# Altium PCB PCBLASTATEMP.PcbDoc
Units mm, origin at the board's own origin, x right, y up, seen from the top; angles counter-clockwise.
Board outline 17.78 x 43.18 mm, 2 copper layers (Top Layer, Bottom Layer); 23 components, 42 nets, 154 pads, 38 vias.
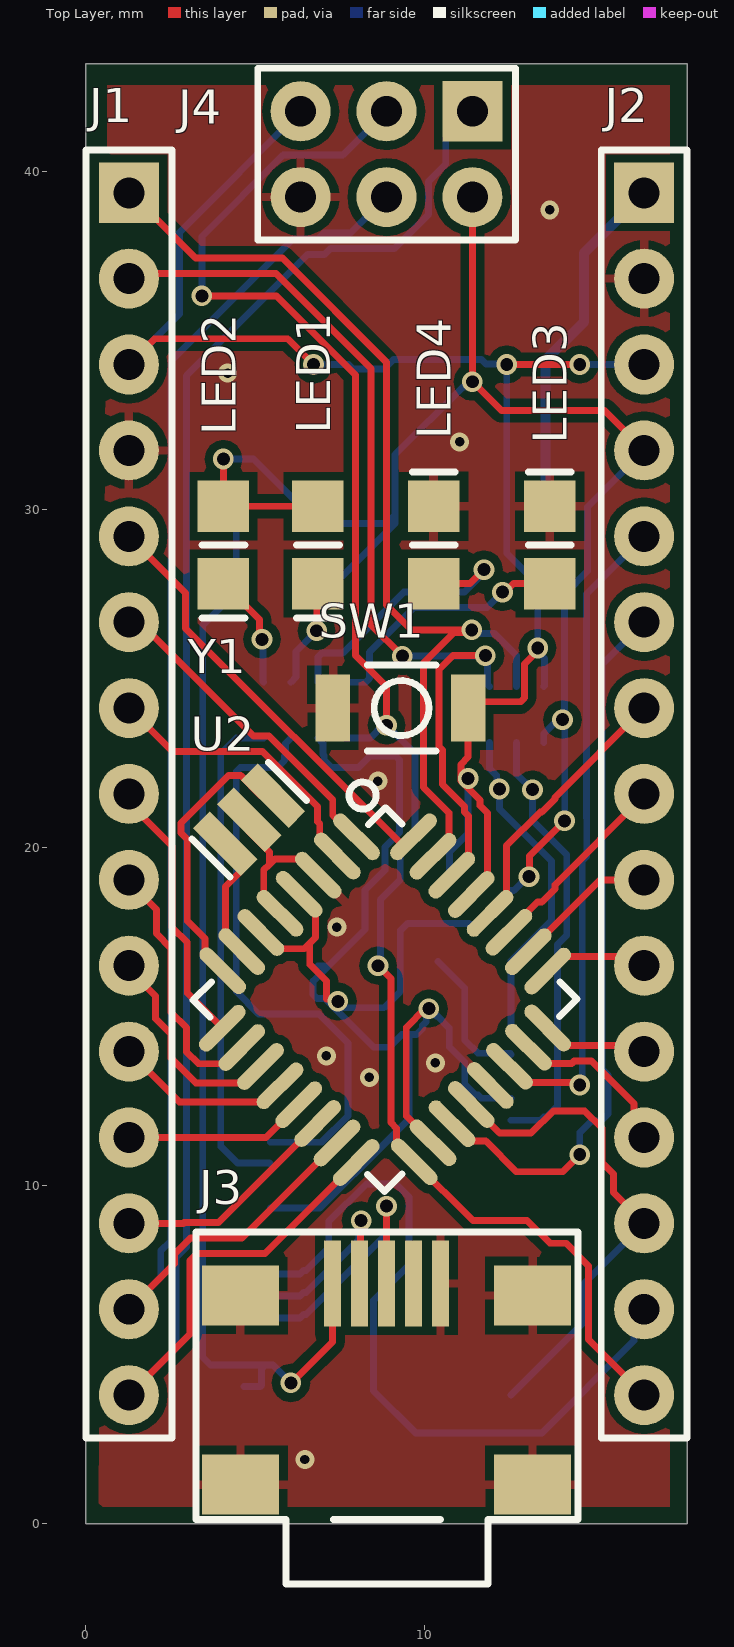
[diagram p0: Top Layer view]
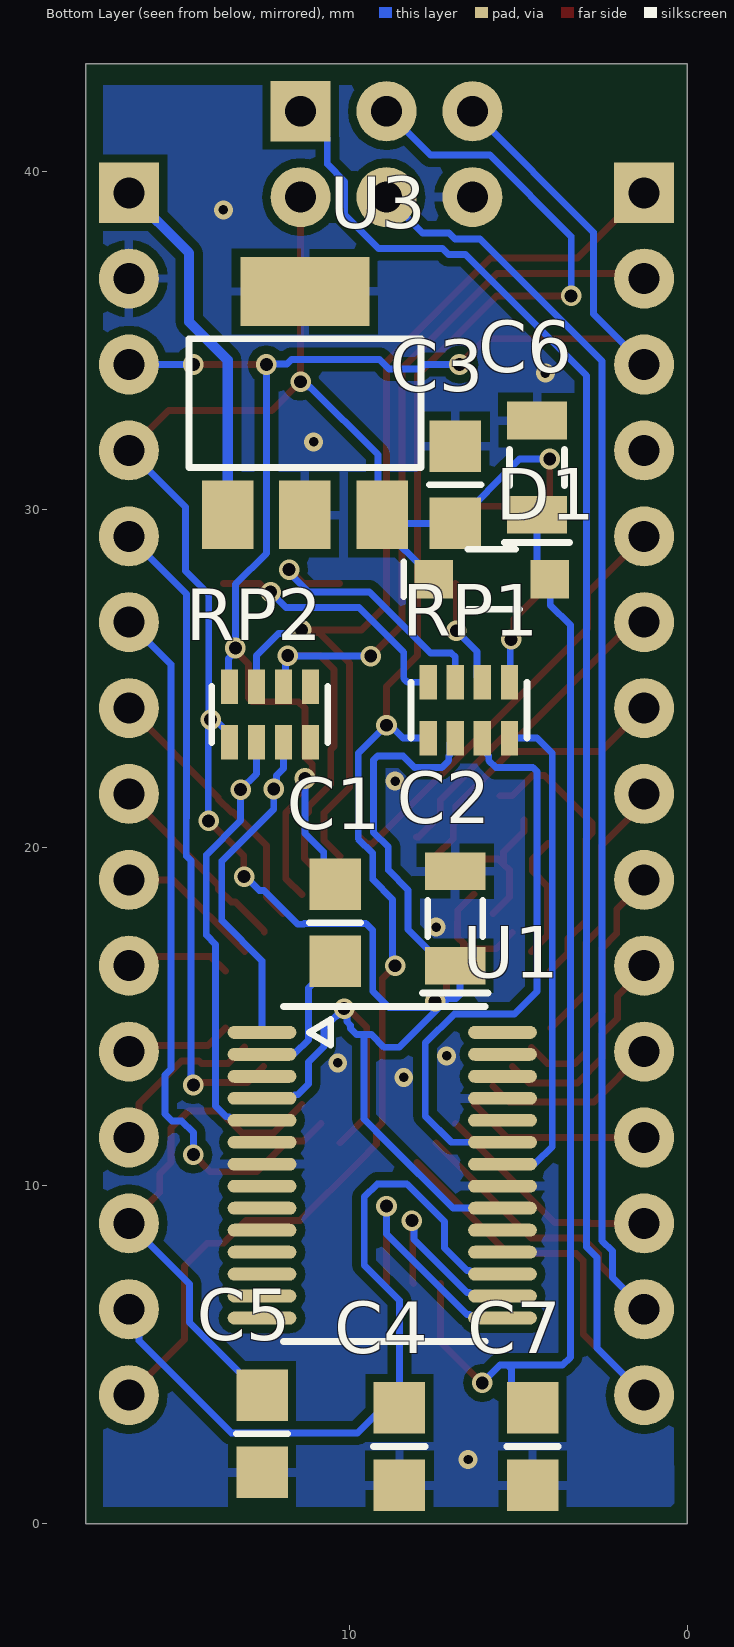
[diagram p1: Bottom Layer view, seen from below]

## Layer stack, top to bottom
Top Solder: solder mask 0.0102, Solder Resist, Dk 3.5
Top Layer: signal copper 0.0356
Dielectric 1: dielectric 0.32, FR-4, Dk 4.8
Bottom Layer: signal copper 0.0356
Bottom Solder: solder mask 0.0102, Solder Resist, Dk 3.5

## Board outline
0,0 0,43.18 17.78,43.18 17.78,0

## Design rules (kind name [scope] priority, off if disabled: settings)
Clearance [All] p1: gap=0.254 ignorepadtopadclearanceinfootprint=FALSE
PlaneConnect PlaneConnect_GND [All] p1: pad.planeconnectstyle=Direct pad.reliefexpansion=0.508 pad.reliefentries=4 pad.reliefconductorwidth=0.254 pad.reliefairgap=0.254 via.planeconnectstyle=Relief via.reliefexpansion=0.508 via.reliefentries=4 via.reliefconductorwidth=0.254 via.reliefairgap=0.254
PlaneConnect [All] p2: planeconnectstyle=Relief reliefexpansion=0.457 reliefentries=4 reliefconductorwidth=0.254 reliefairgap=0.203
PolygonConnect [All] p1: connectstyle=Relief reliefconductorwidth=0.254 reliefentries=4 polygonreliefangle="90 Angle" airgapwidth=0.254
RoutingVias [All] p1: holewidth=0.381 width=0.762 viastyle="Through Hole" minholewidth=0.305 minwidth=0.61 maxholewidth=0.457 maxwidth=0.66
SolderMaskExpansion [All] p1: expansion=0.102 istentingtop=FALSE
SupplyNets "Schematic Supply Nets_4" [InNet('+5')] p1: voltage=0.000
SupplyNets "Schematic Supply Nets_3" [InNet('GND')] p2: voltage=0.000
SupplyNets "Schematic Supply Nets_2" [InNet('+3.3')] p3: voltage=0.000
SupplyNets "Schematic Supply Nets_1" [InNet('VUSB')] p4: voltage=0.000
SupplyNets "Schematic Supply Nets" [InNet('VIN')] p5: voltage=0.000
Width Width_small [All] p1: maxlimit=1.27 minlimit=0.152 preferedwidth=0.203
Width Width_default [All] p2: maxlimit=1.27 minlimit=0.203 preferedwidth=0.254
29 further rules are at their usual default settings.

## Components (designator, comment, footprint, x,y, rotation, side; value= is the part's Value field where it differs from the comment)
C1 "0.1uF" CAP0805-NP 10.414,18.923 r270 bottom
C2 "4.7uF" TAN-A 6.858,16.51 r90 bottom
C3 "0.1uF" CAP0805-NP 6.858,29.591 r90 bottom
C4 "0.1uF" CAP0805-NP 8.509,3.429 r270 bottom
C5 "0.1uF" CAP0805-NP 12.573,3.81 r270 bottom
C6 "4.7uF" TAN-A 4.445,29.845 r90 bottom
C7 "0.1uF" CAP0805-NP 4.572,3.429 r270 bottom
D1 "MBR0520" SOD-123 7.493,27.94 r180 bottom
J1 "HEAD15-NOSS-1" HEAD15-NOSS-1 1.27,39.37 r270 top
J2 "HEAD15-NOSS-1" HEAD15-NOSS-1 16.51,39.37 r270 top
J3 "USB-MINI-B%C" USB-MINI-B_2 10.49,7.112 r180 top
J4 "HEAD3X2" HEAD3X2 11.43,41.783 r180 top
LED1 "RED_RX" LED0805 6.858,27.813 r90 top
LED2 "GREEN_TX" LED0805 4.064,27.813 r90 top
LED3 "L_AMBER" LED0805 13.716,30.099 r270 top
LED4 "BLUE" LED0805 10.287,30.099 r270 top
RP1 "330" RES4NT 7.658,23.241 r180 bottom
RP2 "1K" RES4NT 11.138,24.765 r0 bottom
SW1 "RESET" 157SW 7.302,24.13 r0 top
U1 "FT232RL" SSOP28 12.573,14.538 r270 bottom
U2 "ATMEGA328" QFP032 8.001,20.32 r225 top
U3 "UA78M05" SOT223 13.589,29.845 r180 bottom
Y1 "16MHz" RESONATOR 4.826,20.828 r45 top

## Footprints (in the part's own frame and the unit in brackets; to place one, negate y for a bottom-side part, rotate by r counter-clockwise, add the part's x,y. Pads: shape width x height; smd on the part's side, far side on the other; paste and mask are expansions set on the pad)
157SW [mil] "157SW"
  rect 40x78 smd: 1(0,0) 2(157.5,0)
  silkscreen extent 40,-50 120,50, body extent 0,-50 157,50, height 69
CAP0805-NP [mil] "CAP0805-NP"
  rect 60x60 smd: 1(0,0) 2(90,0)
  silkscreen extent 45,-30 45,30, body extent 5,-25 85,25, height 35
HEAD3X2 [mil] "HEAD3X2"
  rect 70x70 / inner round 0 / far side rect 70x70 hole 36: 1(0,0)
  round 70 / inner round 0 / far side round 70 hole 36: 2(0,100) 3(100,0) 4(100,100) 5(200,0) 6(200,100)
  silkscreen extent -50,-50 250,150, body extent -50,-50 250,150, height 445
HEAD15-NOSS-1 [mil] "HEAD15-NOSS-1"
  rect 70x70 / inner round 0 / far side rect 70x70 hole 36: 1(0,0)
  round 70 / inner round 0 / far side round 70 hole 36: 2(100,0) 3(200,0) 4(300,0) 5(400,0) 6(500,0) 7(600,0) 8(700,0) 9(800,0) 10(900,0) 11(1000,0) 12(1100,0) 13(1200,0) 14(1300,0) 15(1400,0)
  silkscreen extent -50,-50 1450,50, body extent -50,-50 1450,50, height 425
LED0805 [mil] "LED0805"
  rect 60x60 smd: 1(0,0) 2(90,0)
  silkscreen extent -40,-25 45,25, body extent 5,-25 85,25, height 31
QFP032 [mil] "QFP032"
  rrect100% 17x70 smd: 1(0,0) 2(31.48,0) 3(62.97,0) 4(94.45,0) 5(125.93,0) 6(157.42,0) 7(188.9,0) 8(220.38,0) 17(220,315) 18(188.9,314.83) 19(157.42,314.83) 20(125.93,314.83) 21(94.45,314.83) 22(62.97,314.83) 23(31.45,314.83) 24(0,314.83)
  rrect100% 70x17 smd: 9(268,47) 10(268,79) 11(268,110) 12(268,142) 13(268,173) 14(268,204) 15(268,236) 16(268.33,267.83) 25(-47,268) 26(-47,236) 27(-47,204) 28(-47,173) 29(-47,142) 30(-47,110) 31(-47,79) 32(-47,47)
  silkscreen extent -55,-45 269,315, body extent -48,0 269,315, height 47
RES4NT [mil] "RES4NT"
  rect 20x40 smd: 1(0,0) 2(31.5,0) 3(63,0) 4(94.5,0) 5(94.5,65) 6(63,65) 7(31.5,65) 8(0,65)
  silkscreen extent -20,0 115,65, body extent -20,0 115,65, height 24
RESONATOR [mm] "RESONATOR"
  rect 0.7x2 smd: 1(-1,0) 2(0,0) 3(1,0)
  silkscreen extent -1.6,-0.8 1.6,0.8, body extent -1.4,-0.8 1.4,0.8, height 1
SOD-123 [mil] "SOD-123"
  rect 45x45 smd: 1(0,0) 2(135,0)
  silkscreen extent -35,-35 100,35, body extent 10,-35 125,35, height 53
SOT223 [mil] "SOT223"
  rect 60x80 smd: 1(0,0) 2(90,0) 3(180,0)
  rect 150x80 smd: 4(90,260)
  silkscreen extent -45,55 225,205, body extent -45,55 225,205, height 67
SSOP28 [mil] "SSOP28"
  rrect100% 15x80 smd: 1(0,0) 2(25.6,0) 3(51.18,0) 4(76.77,0) 5(102.37,0) 6(127.95,0) 7(153.53,0) 8(179.13,0) 9(204.72,0) 10(230.32,0) 11(255.92,0) 12(281.5,0) 13(307.08,0) 14(332.68,0) 15(332.68,280) 16(307.08,280) 17(281.5,280) 18(255.92,280) 19(230.32,280) 20(204.72,280) 21(179.13,280) 22(153.53,280) 23(127.95,280) 24(102.37,280) 25(76.77,280) 26(51.18,280) 27(25.58,280) 28(0,280)
  silkscreen extent -30,25 360,260, body extent -30,25 360,260, height 79
TAN-A [mil] "TAN-A"
  rect 44x70 smd: 1(0,0) 2(110,0)
  silkscreen extent -32,-38 76,38, body extent -17,-32 127,32, height 63
USB-MINI-B_2 [mil] "USB-MINI-B_2"
  rect 20x100 smd: 1(0,0) 2(31.5,0) 3(62.99,0) 4(94.49,0) 5(125.98,0)
  rect 90x70 smd: 6(-106.99,234.17) 7(-106.99,14.17) 8(233.01,14.17) 9(233.01,234.17)
  silkscreen extent -160,-60 285,350, body extent -160,-60 285,350, height 156

## Part data
C1 C3 C4 C5 C7: library part CAP0805-NP, "Capacitor 0.1uF, 10%,50V", Manufacturer=KEMET, Part Number=C0805C104K5RACTU, DeviceSetName=CAP0805-NP, GateName_1=G$1, LibraryName=MySMD, SymbolName_1=CAP-NP
C2 C6: library part CAP-TANA-P, "Capacitor 4.7uF,10%,20V,TANT-A", Manufacturer=AVX, Part Number=TPSA475K020R1800, DeviceSetName=CAP-TANA-P, GateName_1=G$1, LibraryName=MySMD, SymbolName_1=CAP-P
D1: "MBR0520 SOD-123", Manufacturer="ON Semiconductor", Part Number=MBR0520LT1G, DeviceSetName=MBR0520, GateName_1=G$1, LibraryName=MySMD, SymbolName_1=SCHOTTKY
J1 J2: "HEAD15-NOSS 2.54mm", Manufacturer=MOLEX, Part Number=22-03-2151, DeviceSetName=HEAD15-NOSS-1, GateName_1=G$1, LibraryName=MyCON2, SymbolName_1=HEAD15-NOSS
J3: library part USB-MINI-B, "USB-MINI-B", Manufacturer=TE, Part Number=1734035-2, DeviceName=%C, DeviceSetName=USB-MINI-B, GateName_1=G$1, LibraryName=MyCON2, SymbolName_1=USB
J4: "HEAD3X2 2.54mm", Manufacturer=3M, Part Number=961206-6404-AR, DeviceSetName=HEAD3X2, GateName_1=G$1, LibraryName=MyCON2, SymbolName_1=HEAD3X2
LED1: library part LED0805_RED_LH-R974_OSRAM, "RED_RX LED0805", Manufacturer="OS RAM", Part Number="LH R974", DeviceSetName=LED0805, GateName_1=G$1, LibraryName=MySMD, SymbolName_1=LED
LED2: library part LED0805_LTST-C171GKT_LITE-ON, "GREEN_TX LED0805", Manufacturer=LITE-ON, Part Number=LTST-C171GKT, DeviceSetName=LED0805, GateName_1=G$1, LibraryName=MySMD, SymbolName_1=LED
LED3: library part LED0805_LTST-C171AKT_LITE-ON, "L_AMBER LED0805", Manufacturer=LITE-ON, Part Number=LTST-C171AKT, DeviceSetName=LED0805, GateName_1=G$1, LibraryName=MySMD, SymbolName_1=LED
LED4: library part LED0805_LTST-C170TBKT_LITE-ON, "BLUE LED0805", Manufacturer=LITE-ON, Part Number=LTST-C170TBKT, DeviceSetName=LED0805, GateName_1=G$1, LibraryName=MySMD, SymbolName_1=LED
RP1: library part RES4NT_1, "330 RES4NT", Manufacturer=Panasonic, Part Number=EXB38V331JV, DeviceSetName=RES4NT, GateName_1=A, GateName_2=B, GateName_3=C, GateName_4=D, LibraryName=MySMD, SymbolName_1=RES4NT, SymbolName_2=RES4NT, SymbolName_3=RES4NT, SymbolName_4=RES4NT
RP2: library part RES4NT, "1K RES4NT", Manufacturer=Panasonic, Part Number=EXB38V102JV, DeviceSetName=RES4NT, GateName_1=A, GateName_2=B, GateName_3=C, GateName_4=D, LibraryName=MySMD, SymbolName_1=RES4NT, SymbolName_2=RES4NT, SymbolName_3=RES4NT, SymbolName_4=RES4NT
SW1: library part PB157, "RESET PB157 157SW", Manufacturer=OMRON, Part Number=B3U-1000P, DeviceSetName=PB157, GateName_1=G$1, LibraryName=MySMD, SymbolName_1=PBSWITCH
U1: "FT232RL FT232RL SSOP28", Manufacturer=FTDI, DeviceSetName=FT232RL, GateName_1=G$1, LibraryName=MySMD2, Part Number=FT232RL, SymbolName_1=FL232RL
U2: library part ATMEGA168-20AU, "ATMEGA328P-AU ATMEGA168-20AU QFP032", Manufacturer=Microchip, Part Number=ATMEGA328P-AU, DeviceSetName=ATMEGA168-20AU, GateName_1=G$1, LibraryName=MySMD, SymbolName_1=ATMEGA168-20AU
U3: "UA78M05 SOT223", Manufacturer=TI, Part Number=UA78M05CDCY, DeviceSetName=UA78M05, GateName_1=G$1, LibraryName=MySMD, SymbolName_1=UA78M05
Y1: library part RESONATORMU, "16MHz RESONATOR", Manufacturer=Murata, Part Number=CSTCE16M0V53A-R0, DeviceName=MU, DeviceSetName=RESONATOR, GateName_1=G$1, LibraryName=MySMD2, SymbolName_1=RESONATOR

## Via types
v1: diameter 0.61, hole 0.381, Top Layer to Bottom Layer, 29 vias
v2: diameter 0.559, hole 0.279, Top Layer to Bottom Layer, 9 vias

## Nets (pads, with @x,y where several pads share a name; then routed paths per layer and width w, separated by ;. In a path a pad name is that pad's centre, name@x,y a point inside that pad or via, vN(x,y) a via of type N, cw(c..) or ccw(c..) an arc to the next point about the centre after c; other vN are vias at no path point)
+3.3: C4.1 J2.14 U1.17 | length 22.4
  Bottom Layer w0.203: U1.17 6.335,7.388 6.438,7.492 6.513,7.492 7.179,8.158 7.179,8.946 8.292,10.058 9.164,10.058 9.55,9.672 9.55,7.655 8.509,6.614 8.509,3.937 9.754,2.692 13.482,2.692 16.209,5.419 16.209,6.049 J2.14
+5: C2.1 C3.1 D1.1 J2.4 J4.2 LED1.2 LED2.2 RP1.2 RP2.5 U1.4 U1.20 U2.4 U2.6 U2.18 U3.3 | length 91.2
  Top Layer w0.203: v1(4.064,31.496) LED2.2 LED1.2 ; U2.6 5.656,17.011 6.452,17.011 6.619,17.178 ; U2.4 6.784,18.144 6.784,17.821 6.787,17.819 6.787,17.346 6.619,17.178 ; v1(7.452,15.453) 7.376,15.529 7.112,15.529 7.112,16.056 6.619,16.549 6.619,17.178 ; v1(10.143,15.24) 10.033,15.24 9.474,14.681 9.474,12.061 U2.18 ; J4.2 v1(11.43,33.782) 12.285,32.927 15.333,32.927 J2.4 ; v1(13.103,19.145) 13.113,19.155 13.113,19.755 v1(14.153,20.794)
  Bottom Layer w0.203: v1(4.064,31.496) 4.953,31.496 C3.1 8.89,29.591 U3.3@9.144,29.845 ; U1.20 6.925,9.338 8.89,11.303 9.56,11.973 9.56,14.478 ; C2.1 C2.1@7.188,16.51 ; RP1.2 7.01,23.089 7.01,22.754 7.048,22.716 7.048,22.586 7.257,22.377 8.059,22.377 8.398,22.716 9.152,22.716 9.271,22.597 9.271,20.453 8.839,20.022 8.839,19.335 8.255,18.75 8.255,17.577 C2.1@7.188,16.51 ; v1(7.452,15.453) 7.452,15.3 7.418,15.266 8.808,15.266 9.296,15.754 9.296,17.546 9.505,17.755 11.323,17.755 11.343,17.735 11.512,17.735 12.51,18.733 12.653,18.733 13.066,19.145 v1(13.103,19.145) ; D1.1 9.144,29.591 U3.3@9.144,29.845 ; v1(11.43,33.782) 11.348,33.782 11.195,33.63 11.151,33.63 9.144,31.623 U3.3@9.144,29.845 ; U1.4 11.699,12.588 11.596,12.692 11.54,12.692 11.521,12.692 11.201,13.012 11.201,13.665 10.744,14.123 10.744,14.673 10.392,15.025 10.358,15.025 v1(10.143,15.24) 10.065,15.162 10.065,14.858 9.955,14.748 9.955,14.654 9.779,14.478 9.56,14.478 ; RP2.5 13.538,23.368 13.879,23.709 13.906,23.709 13.984,23.786 v1(14.094,23.786) ; v1(14.153,20.794) 14.162,20.803 14.162,23.748 14.162,23.812 14.148,23.826 14.148,27.494 14.834,28.18 14.834,30.074 J2.4 ; C2.1@7.188,16.51 6.731,16.053 6.716,16.053 6.716,15.661 6.835,15.541 7.076,15.541 7.385,15.233 8.521,14.097 8.959,14.097 9.34,14.478 9.56,14.478
A0: J2.12 U2.23 | length 5
  Top Layer w0.203: U2.23 13.573,13.618 14.368,13.618 14.439,13.689 14.953,13.689 16.209,12.433 16.209,11.731 J2.12
A1: J2.11 U2.24 | length 3.1
  Top Layer w0.203: U2.24 14.175,14.146 16.334,14.146 J2.11
A2: J2.10 U2.25 | length 3.1
  Top Layer w0.203: U2.25 14.091,16.783 16.237,16.783 J2.10
A3: J2.9 U2.26 | length 4.3
  Top Layer w0.203: U2.26 15.208,19.05 J2.9
A4: J2.8 U2.27 | length 5.8
  Top Layer w0.203: U2.27 12.509,17.545 13.354,18.39 13.482,18.39 13.868,18.776 13.868,18.904 16.51,21.546 J2.8
A5: J2.7 U2.28 | length 8
  Top Layer w0.203: U2.28 12.443,18.548 12.443,20.063 13.437,21.057 13.482,21.057 13.868,21.443 13.868,21.488 J2.7
A6: J2.6 U2.19 | length 21.4
  Top Layer w0.203: U2.19 11.34,11.326 11.825,11.326 12.737,10.414 14.097,10.414 v1(14.605,10.922)
  Bottom Layer w0.203: v1(14.605,10.922) 14.605,11.574 14.949,11.918 15.237,11.918 15.443,12.123 15.443,13.277 15.265,13.454 15.265,19.566 15.27,19.57 15.27,21.07 15.265,21.074 15.265,25.425 J2.6
A7: J2.5 U2.22 | length 19.3
  Top Layer w0.203: U2.22 13.006,13.053 14.532,13.053 v1(14.605,12.98)
  Bottom Layer w0.203: v1(14.605,12.98) 14.678,13.053 14.678,19.625 14.813,19.76 14.813,20.88 14.808,20.885 14.808,27.508 J2.5
AREF: C5.1 J2.13 U2.20 | length 14.7
  Top Layer w0.203: U2.20 12.238,11.56 13.166,11.56 13.824,12.217 14.752,12.217 15.265,11.704 15.265,10.688 15.599,10.354 15.599,9.801 J2.13
  Bottom Layer w0.203: C5.1 14.721,5.958 14.721,7.101 J2.13
D0/RX: J1.2 RP2.2 U2.30 | length 28.9
  Top Layer w0.203: J1.2 1.422,36.982 5.619,36.982 8.433,34.169 8.433,26.592 v1(9.356,25.668) ; U2.30 11.311,19.679 11.311,20.935 11.194,21.052 11.194,21.222 10.541,21.875 10.541,22.891 10.439,22.992 10.439,25.268 10.851,25.679 v1(11.811,25.679)
  Bottom Layer w0.203: v1(9.356,25.668) 9.362,25.674 11.805,25.674 v1(11.811,25.679) 11.874,25.616 11.874,24.828 RP2.2
D1/TX: J1.1 RP2.3 U2.31 | length 30.3
  Top Layer w0.203: J1.1 2.057,38.583 2.102,38.583 3.245,37.44 5.808,37.44 8.89,34.358 8.89,27.183 9.629,26.444 10.891,26.444 11.331,26.444 v1(11.409,26.444) 11.331,26.366 10.891,26.366 9.982,25.457 9.982,21.787 10.737,21.033 10.737,20.218 U2.31
  Bottom Layer w0.203: v1(11.409,26.444) 11.519,26.444 11.623,26.34 12.085,26.34 12.738,25.686 RP2.3
D2: J1.5 U2.32 | length 12.9
  Top Layer w0.203: J1.5 2.946,27.534 2.946,26.485 9.325,20.106 9.475,20.106 U2.32
D3: J1.6 U2.1 | length 9.6
  Top Layer w0.203: J1.6 1.589,26.67 4.957,23.303 5.41,23.303 7.301,21.412 7.301,20.959 7.939,20.32 U2.1
D4: J1.7 U2.2 | length 8.5
  Top Layer w0.203: J1.7 2.555,22.845 5.221,22.845 6.843,21.223 6.843,20.769 6.916,20.697 6.916,20.274 U2.2
D5: J1.8 U2.9 | length 8.1
  Top Layer w0.203: J1.8 1.27,21.325 2.54,20.055 2.54,17.647 2.995,17.191 2.995,15.699 U2.9
D6: J1.9 U2.10 | length 7.8
  Top Layer w0.203: J1.9 1.27,18.987 2.083,18.175 2.083,17.457 2.515,17.026 2.515,15.132 2.972,14.675 2.972,13.962 3.322,13.612 4.131,13.612 U2.10
D7: J1.10 U2.11 | length 6.4
  Top Layer w0.203: J1.10 1.27,16.397 2.057,15.609 2.057,14.943 2.515,14.486 2.515,13.773 3.247,13.04 4.673,13.04 U2.11
D8: J1.11 U2.12 | length 5.3
  Top Layer w0.203: J1.11 2.76,12.48 5.262,12.48 U2.12
D9: J1.12 U2.13 | length 5.4
  Top Layer w0.203: J1.12 5.325,11.43 U2.13
D10: J1.13 U2.14 | length 6.8
  Top Layer w0.203: J1.13 2.881,8.89 2.902,8.911 3.92,8.911 U2.14
D11/MOSI: J1.14 J4.4 U2.15 | length 45.3
  Top Layer w0.203: J1.14 2.616,7.696 2.616,7.978 3.092,8.454 4.612,8.454 U2.15
  Bottom Layer w0.203: J1.14 2.21,7.29 2.21,8.07 2.515,8.374 2.515,34.392 4.348,36.225 6.121,37.998 6.866,37.998 7.043,38.176 7.823,38.176 J4.4
D12/MISO: J1.15 J4.1 U2.16 | length 54.4
  Top Layer w0.203: J1.15 3.073,5.613 3.073,7.788 3.281,7.997 5.298,7.997 U2.16
  Bottom Layer w0.203: J1.15 2.667,5.207 2.667,7.88 2.972,8.185 2.972,33.96 6.553,37.541 7.055,37.541 7.233,37.719 9.126,37.719 10.135,38.727 10.135,39.708 10.643,40.216 10.643,40.996 J4.1
D13/SCK: J2.15 J4.3 RP1.1 U2.17 | length 51.5
  Top Layer w0.203: v1(3.429,36.322) 5.633,36.322 7.976,33.979 7.976,25.679 8.89,24.765 v1(8.89,23.622) ; v1(8.636,16.51) 9.017,16.129 9.017,11.872 9.188,11.701 9.188,11.231 U2.17 11.444,8.974 13.045,8.974 13.717,8.302 14.192,8.302 14.864,7.63 14.864,5.456 J2.15
  Bottom Layer w0.203: v1(3.429,36.322) 3.429,38.082 5.834,40.488 7.595,40.488 J4.3 ; RP1.1 8.409,23.241 8.79,23.622 8.892,23.622 9.728,22.786 9.728,20.264 9.296,19.832 9.296,19.057 8.712,18.473 8.712,16.586 v1(8.636,16.51)
GND: C2.2 C3.2 C4.2 C5.2 C6.2 C7.2 J1.4 J2.2 J3.1 J3.6 J3.7 J3.8 J3.9 J4.6 LED3.1 LED4.1 SW1.1 U1.7 U1.18 U1.21 U1.25 U2.3 U2.5 U2.21 U3.2 U3.4 Y1.2 | length 5
  Top Layer w0.203: Y1.2 4.826,20.477 5.429,19.874 5.429,19.508 ; U2.5 5.257,18.54 5.257,19.336 5.429,19.508 ; U2.3 6.388,19.671 5.592,19.671 5.429,19.508
  other v2: 6.477,1.905 8.382,13.208 10.333,13.635 7.112,13.843 7.422,17.653 8.636,21.971 11.049,32.004 4.191,34.036 13.716,38.862
NetC1_2: C1.2 U1.2 | length 4.2
  Bottom Layer w0.203: C1.2 11.201,15.85 11.201,14.312 11.591,13.922 12.539,13.922 U1.2
NetJ3_3: J3.3 U1.15 | length 7.6
  Top Layer w0.203: J3.3 v1(8.89,9.398)
  Bottom Layer w0.203: U1.15 6.335,6.088 6.439,6.192 6.513,6.192 8.89,8.57 v1(8.89,9.398)
NetJ3_4: J3.4 U1.16 | length 5.8
  Top Layer w0.203: J3.4 8.114,7.137 8.114,8.947 v1(8.139,8.972)
  Bottom Layer w0.203: U1.16 6.335,6.738 6.438,6.842 6.513,6.842 8.078,8.407 8.078,8.911 v1(8.139,8.972)
NetLED1_1: LED1.1 RP1.6 | length 3.3
  Top Layer w0.203: v1(6.824,26.415) 6.824,27.779 LED1.1
  Bottom Layer w0.203: RP1.6 6.21,25.044 6.21,25.802 v1(6.824,26.415)
NetLED2_1: LED2.1 RP1.5 | length 3.4
  Top Layer w0.203: LED2.1 5.129,26.748 5.129,26.24 v1(5.207,26.162)
  Bottom Layer w0.203: v1(5.207,26.162) 5.232,26.137 5.232,24.917 RP1.5
NetLED3_2: LED3.2 RP1.8 | length 7.7
  Top Layer w0.203: v1(12.319,27.559) 12.395,27.559 12.649,27.813 LED3.2
  Bottom Layer w0.203: RP1.8 8.263,24.892 8.382,25.011 8.382,25.781 9.705,27.104 11.864,27.104 v1(12.319,27.559)
NetLED4_2: LED4.2 RP1.7 | length 8.4
  Top Layer w0.203: LED4.2 11.354,27.813 11.767,28.226 v1(11.771,28.226)
  Bottom Layer w0.203: RP1.7 6.858,25.637 6.977,25.756 7.595,25.756 9.4,27.561 11.199,27.561 11.771,28.133 v1(11.771,28.226)
NetRP1_5: RP1.4 U1.22 | length 14.8
  Bottom Layer w0.203: RP1.4 4.445,23.241 3.988,22.784 3.988,11.164 4.479,10.673 5.427,10.673 U1.22
NetRP1_6: RP1.3 U1.23 | length 17.5
  Bottom Layer w0.203: U1.23 6.97,11.288 7.747,12.065 7.747,14.224 6.887,15.084 6.258,15.084 5.109,15.084 4.445,15.748 4.445,22.258 4.564,22.377 5.659,22.377 5.867,22.586 5.867,22.716 5.905,22.754 5.905,23.089 RP1.3
NetU2_7: U2.7 Y1.1 | length 3.8
  Top Layer w0.203: Y1.1 4.579,19.661 4.579,19.31 4.126,18.858 4.126,17.409 U2.7
NetU2_8: U2.8 Y1.3 | length 8.4
  Top Layer w0.203: U2.8 3.523,16.882 3.523,17.31 2.997,17.836 2.997,20.245 2.809,20.433 2.809,20.728 4.219,22.138 4.579,22.138 5.182,21.535 Y1.3
RESET: C1.1 J1.3 J2.3 J4.5 RP2.4 SW1.2 U2.29 | length 49.1
  Top Layer w0.203: J1.3 2.032,35.052 5.969,35.052 v1(6.731,34.29) ; v1(11.303,22.047) 11.087,22.263 ; U2.29 11.871,19.09 11.871,21.022 11.651,21.242 11.651,21.411 11.087,21.976 11.087,22.263 ; v1(12.446,34.29) v1(14.605,34.29) ; v1(13.36,25.908) 13.36,25.823 12.97,25.433 12.97,24.435 12.851,24.316 11.489,24.316 SW1.2 11.303,22.68 11.087,22.463 11.087,22.263
  Bottom Layer w0.203: J1.3 2.769,35.789 2.769,38.202 J4.5 ; v1(6.731,34.29) 7.765,34.29 7.892,34.163 8.815,34.163 9.094,34.442 11.704,34.442 11.836,34.31 12.426,34.31 v1(12.446,34.29) 12.446,28.707 13.36,27.793 v1(13.36,25.908) 13.36,25.798 13.564,25.595 13.564,24.79 RP2.4 ; C1.1 10.748,19.257 10.748,19.871 11.303,20.425 v1(11.303,22.047) ; v1(14.605,34.29) J2.3
RX: RP2.7 U1.1 | length 9.8
  Bottom Layer w0.203: RP2.7 11.938,22.346 12.148,22.136 12.148,21.814 v1(12.226,21.736) 12.226,21.17 12.226,21.14 13.764,19.602 13.764,17.845 12.573,16.654 U1.1
TX: RP2.6 U1.5 | length 13
  Bottom Layer w0.203: U1.5 13.447,11.938 13.551,12.042 13.625,12.042 13.945,12.362 13.945,17.14 14.221,17.416 14.221,19.791 13.208,20.804 v1(13.208,21.717) 12.738,22.187 RP2.6
VIN: J2.1 U3.1 | length 10.7
  Bottom Layer w0.305: U3.1 13.589,34.417 14.732,35.56 14.732,37.592 J2.1
VUSB: C6.1 C7.1 D1.2 J3.5 | length 32.9
  Top Layer w0.203: v1(6.06,4.173) 6.078,4.173 7.29,5.385 J3.5
  Bottom Layer w0.203: C6.1 4.445,28.321 D1.2 4.049,27.925 4.049,27.183 3.454,26.588 3.454,4.928 3.683,4.699 5.309,4.699 ; C7.1@4.674,4.064 5.164,4.064 5.19,4.089 5.19,4.58 5.309,4.699 ; v1(6.06,4.173) 5.534,4.699 5.309,4.699
pads on no net: J3.2 RP2.1 RP2.8 U1.3 U1.6 U1.8 U1.9 U1.10 U1.11 U1.12 U1.13 U1.14 U1.19 U1.24 U1.26 U1.27 U1.28

## Polygon pours and split planes (outlines as drawn)
GND on Top Layer "GND_L01_P000" (solid, remove dead copper, pour order 0): 0.635,42.545 17.272,42.545 17.272,0.508 0.381,0.508
GND on Bottom Layer "GND_L02_P001" (solid, remove dead copper, pour order 1): 0.635,42.545 17.272,42.545 17.272,0.508 0.381,0.508

## Silkscreen, mask and mechanical layers (free items; w line width, h text height)
DXF:
  drawing of 399 lines, arcs and shapes, not listed
  text ".700" at 7.035,44.793 h0.79
  text "J1" at 0.864,41.046 h0.51
  text "J2" at 15.9,41.046 h0.51
  text "J4" at 8.306,36.855 h0.51
  text "LED3" at 13.792,31.471 h0.51 r90
  text "LED4" at 10.389,31.42 h0.51 r90
  text "LED1" at 6.553,31.344 h0.51 r270
  text "LED2" at 3.835,31.318 h0.51 r270
  text "SW1" at 8.636,25.781 h0.51
  text "Y1" at 3.2,22.098 h0.51
  text "1.700" at -5.789,21.298 h0.79
  text "1" at 3.327,19.304 h0.51
  text "U1" at 8.509,15.291 h0.51
  text "J3" at 8.306,4.216 h0.51
FAB_NOTES:
  drawing of 237 lines, arcs and shapes, not listed
  text "REVISIONS" at 273.183,227.463 h2.54
  text "REV" at 202.063,219.843 h2.54
  text "DESCRIPTION" at 250.323,219.843 h2.54
  text "DATE" at 323.983,219.843 h2.54
  text "APPROVED" at 341.763,219.843 h2.54
  text "Layer" at 14.034,203.644 h1.52
  text "Name" at 24.445,203.644 h1.52
  text "Material" at 48.061,203.644 h1.52
  text "Thickness" at 69.899,203.644 h1.52
  text "Constant" at 86.405,203.644 h1.52
  text "Board Layer Stack" at 100.879,203.644 h1.52
  text "Top Overlay" at 24.445,200.596 h1.52
  text "Top Solder" at 24.445,197.548 h1.52
  text "Solder Resist" at 48.061,197.548 h1.52
  text "0.40mil" at 69.899,197.548 h1.52
  text "3.5" at 86.405,197.548 h1.52
  text "1" at 14.034,194.5 h1.52
  text "Top Layer" at 24.445,194.5 h1.52
  text "1.40mil" at 69.899,194.5 h1.52
  text "Dielectric 1" at 24.445,191.452 h1.52
  text "FR-4" at 48.061,191.452 h1.52
  text "12.60mil" at 69.899,191.452 h1.52
  text "4.8" at 86.405,191.452 h1.52
  text "2" at 14.034,188.404 h1.52
  text "Bottom Layer" at 24.445,188.404 h1.52
  text "1.40mil" at 69.899,188.404 h1.52
  text "Bottom Solder" at 24.445,185.356 h1.52
  text "Solder Resist" at 48.061,185.356 h1.52
  text "0.40mil" at 69.899,185.356 h1.52
  text "3.5" at 86.405,185.356 h1.52
  text "Bottom Overlay" at 24.445,182.308 h1.52
  text "FAB NOTES:UNLESS OTHERWISE SPECIFIED. /    1.  THE FINISHED PRINTED CIRCUIT BOARD SHALL MEET THE REQUIREMENTS OF /        IPC-A-600, CLASS 2, AND ROHS COMPLIANCE. /  /    2.  CONFIGURATION OF THE PRINTED CIRCUIT BOARD NOT SPECIFICALLY /        DIMENSIONED ON THE DRAWING SHALL BE CONTROLLED BY THE GERBER DATA. /  /    3.  MATERIAL:  /        A. NEMA GRADE, GLASS EPOXY, NATURAL COLOR /        B. FR406 OR EQUIVALENT LAMINATED HIGH TEMP FR-4 WITH A MINIMUM TG: 170C /        C. THIS PRINTED CIRCUIT BOARD WILL BE 02 LAYERS. /         /    4.  FINISH:  /        A. ALL HOLES AND CONDUCTIVE SURFACES SHALL BE PLATED WITH .001\" /           COPPER MINIMUM, .003\" MAXIMUM,  /           COPPER TO BE MEASURED AT THE CENTER OF VIA HOLE. /        B. ALL COPPER AREAS SHALL BE FINISHED WITH IMMERSION GOLD 2u\" (2 MICROINCHES) /           MINIMUM TO 3u\" MAXIMUM. /        C. VIA IN PAD TECHNOLOGY, THE VIA HOLES (SIZE = .004\";.010\";.012\") SHALL BE FILLED  /           WITH CONDUCTIVE EPOXY THEN PLANALIZED AND PLATED OVER (IF APPLICABLE). /            /    5.  DRILLING: /        A. ALL HOLE'S DIMENSIONS ARE STATED AS FINISHED HOLE SIZES. /        B. LASER DRILLED BLIND MICROVIA-IN-PAD SHALL BE FILLED TO PREVENT VIA  /           OUT-GASSING IN LASER DEFINED HOLES .004\" OR GREATER (IF APPLICABLE). /        B. AN NC DRILL FILE HAS BEEN SUPPLIED - SEE DRILL TABLE. /     /    6.  SOLDER MASK:  /        A. PHOTO-IMAGED LIQUID POLYMER ON BOTH SIDES OF BOARD IN /           ACCORDANCE WITH IPC-SM-840. TYPE B, CLASS 2, OVER BARE COPPER. /        B. SOLDER MASK COLOR TO BE GREEN. /        C. MASK THICKNESS: .0004\" MINIMUM, .0013\" MAXIMUM. /        D. DO NOT BLOCK MASK FINE PITCH SMD PADS. /  /    7.  SILKSCREEN: (IF APPLICABLE) /        A. SILKSCREEN BOTH SIDES WITH WHITE, NON-CONDUCTIVE EPOXY INK.  /        B. LANDS AND EXPOSED PLATED AREAS TO BE FREE OF INK. /  /    8.  BOW AND TWIST: SHALL NOT EXCEED .007\" PER INCH. /  /    9.  ELECTRICAL TEST:  /        A. THE PRINTED WIRING BOARD SHALL BE 100% ELECTRICALLY TESTED  /           FOR OPENS AND SHORTS. THE RESULTS OF THE ELECTRICAL TEST  /           SHALL BE DOCUMENTED AND DELIVERED ALONG WITH EACH LOT. /        B. APPLY TEST STAMP IN NON-LEGEND AREA ON SOLDER SIDE OF PCB. /        C. TEST IS REQUIRED ON BOTH SIDES OF THE BOARD. /  /    10. FABRICATION TOLERANCES:  /        A. END PRODUCT TRACE WIDTHS AND LANDS SHALL NOT VARY MORE THAN  /           THE SMALLER OF .002\" OR 20% OF THE TRACE WIDTH FROM /           THE GERBER DATA /  /    11. INSPECTION: /        A. AUTOMATIC OPTICAL INSPECTION OF ALL LAYERS REQUIRED. /        B. THE IMPEDANCE SHOULD BE CONTROLLED BY STACKUP LAYER. /     /    12. CLEANLINESS: /        A. BOARDS SHALL BE FREE OF FIBER GLASS DUST OR ANY OTHER FOREIGN MATERIAL. /        B. FINISHED BOARDS MUST CONFORM TO 0.01 mg/IN MAXIMUM NACL IONIC  /           CONTAMINATION AS MEAXURED BY THE OMEGA METER 600SMD. /  /    13. NO GERBER MODIFICATIONS ALLOWED WITHOUT PRIOR WRITTEN APPROVAL FROM VIETTEL  /        EXCEPT FOR IMPEDANCE TRACE WIDTHS MODIFICATION TO MEET REQUIREMENTS,  /        AND THE ADDITION OF TEAR DROPS WHERE REQUIRED.  /         /    14. SUPPRESS UNCONNECTED PADS FOR ALL INNER  LAYERS. /     /    15. INSIDE CORNNER SHOULD BE ROUNDED-OFF." at 246.126,49.276 h0.8
  text "COMPANY NAME:" at 294.773,-14.472 h1.52
  text "UNLESS OTHERWISE" at 344.854,-15.361 h1.02
  text "SPECIFIED DIMENSIONS" at 344.854,-17.266 h1.02
  text "FAB DRAWING" at 278.602,-17.596 h2.03
  text "COMPANY NAME" at 318.861,-18.917 h2.03
  text "ARE IN INCHES" at 344.854,-19.171 h1.02
  text "COMPANY LOGO" at 239.154,-21.069 h1.78
  text "PROJECT NAME:" at 294.773,-22.092 h1.52
  text "DESIGNER:" at 265.563,-22.473 h1.27
  text "INITIAL" at 275.723,-22.473 h1.27
  text "TOLERANCES" at 344.854,-22.981 h1.02
  text "CHECKER:" at 265.563,-25.267 h1.27
  text "INITIAL" at 275.723,-25.267 h1.27
  text "BOARD NAME" at 318.861,-25.267 h2.03
  text "DECIMAL" at 345.87,-25.267 h1.02
  text "ANGLE" at 357.391,-25.26 h1.02
  text "COMPANY NAME AND ADDRESS" at 237.757,-25.641 h1.02
  text "X" at 347.612,-26.911 h1.02
  text ".1" at 349.637,-26.918 h1.02
  text "30" at 359.586,-27.045 h1.02
  text "SHEET:" at 332.873,-27.807 h1.52
  text "FAB NUMBER:" at 294.875,-27.832 h1.52
  text "REV." at 325.26,-27.927 h1.52
  text "DATE:" at 265.817,-28.061 h1.27
  text "DDMMMYY" at 272.421,-28.061 h1.27
  text "XX" at 346.596,-28.435 h1.02
  text "MACH FINISH" at 353.708,-28.435 h1.02
  text ".03" at 349.637,-28.442 h1.02
  text "XXX" at 345.58,-29.959 h1.02
  text ".010" at 349.637,-29.966 h1.02
  text "JOB#:" at 265.563,-30.855 h1.27
  text "RD-DDMMYYYY-01" at 271.913,-30.855 h1.27
  text "1 OF 1" at 330.34,-30.975 h2.03
  text "NUMBER" at 296.501,-30.982 h2.03
  text "-" at 326.481,-30.982 h2.03
Drill Drawing:
  circle w0.254: c14.24,156.993 r0.847
  lines w0.254: 13.393,152.337 15.087,152.337 15.087,154.03 13.393,154.03 13.393,152.337 ; 13.393,160.38 13.817,160.38 14.24,159.957 14.663,160.38 15.087,160.38 14.663,160.803 15.087,161.226 14.663,161.226 14.24,161.65 13.817,161.226 13.393,161.226 13.817,160.803 13.393,160.38
  lines w0.381: 11.874,151.194 137.977,151.194 ; 11.874,162.624 137.977,162.624 ; 25.867,147.383 25.867,166.433 ; 39.579,147.383 39.579,166.433 ; 67.257,147.383 67.257,166.433 ; 80.106,147.383 80.106,166.433 ; 98.745,147.383 98.745,166.433 ; 11.874,147.383 137.977,147.383 137.977,166.433 11.874,166.433 11.874,147.383
  text "Symbol" at 14.16,163.766 h1.83
  text "Count" at 27.01,163.766 h1.83
  text "Hole Size" at 40.722,163.766 h1.83
  text "Plated" at 68.4,163.766 h1.83
  text "Hole Type" at 81.249,163.766 h1.83
  text "Drill Layer Pair" at 99.888,163.766 h1.83
  text "9" at 27.01,159.957 h1.52
  text "11.00mil (0.279mm)" at 40.722,159.957 h1.52
  text "PTH" at 68.4,159.957 h1.52
  text "Round" at 81.249,159.957 h1.52
  text "Top Layer - Bottom Layer" at 99.888,159.957 h1.52
  text "29" at 27.01,156.147 h1.52
  text "15.00mil (0.381mm)" at 40.722,156.147 h1.52
  text "PTH" at 68.4,156.147 h1.52
  text "Round" at 81.249,156.147 h1.52
  text "Top Layer - Bottom Layer" at 99.888,156.147 h1.52
  text "36" at 27.01,152.337 h1.52
  text "36.00mil (0.914mm)" at 40.722,152.337 h1.52
  text "PTH" at 68.4,152.337 h1.52
  text "Round" at 81.249,152.337 h1.52
  text "Top Layer - Bottom Layer" at 99.888,152.337 h1.52
  text "74 Total" at 27.01,148.526 h1.52